# EAGLE board Z380X1B (EAGLE 3.51)

Size 160 x 100 mm. Coordinates in mm from the lower left corner, seen from the top.
Outline: 0,0 160,0 160,100 0,100 0,0
Copper layers used: 

## Footprints (pad centres in the part's own frame; a part is rotated, then mirrored left to right if it is on the bottom)
25M/90 = drill 1.016 pad 1.575 octagon:  16.764,-1.27;  13.97,-1.27;  11.176,-1.27;  8.382,-1.27;  5.588,-1.27;  2.794,-1.27;  0,-1.27;  -2.794,-1.27;  -5.588,-1.27;  -8.382,-1.27;  -11.176,-1.27;  -13.97,-1.27;  -16.764,-1.27;  15.367,1.27;  12.573,1.27;  9.779,1.27;  6.985,1.27;  4.191,1.27;  1.397,1.27;  -1.397,1.27;  -4.191,1.27;  -6.985,1.27;  -9.779,1.27;  -12.573,1.27;  -15.367,1.27 | hole 3.2: 23.622,0; -23.622,0
L-14 = drill 0.813 pad 1.397 octagon:  -7.62,-3.81;  -5.08,-3.81;  7.62,-3.81;  7.62,3.81;  -2.54,-3.81;  0,-3.81;  5.08,-3.81;  2.54,-3.81;  5.08,3.81;  2.54,3.81;  0,3.81;  -2.54,3.81;  -5.08,3.81;  -7.62,3.81
00-ADP = drill 0.813 pad 1.397 round:  -20.32,16.51;  -17.78,16.51;  -20.32,13.97;  -17.78,13.97;  -20.32,11.43;  -17.78,11.43;  -20.32,8.89;  -17.78,8.89;  -20.32,6.35;  -17.78,6.35;  -20.32,3.81;  -17.78,3.81;  -20.32,1.27;  -17.78,1.27;  -20.32,-1.27;  -17.78,-1.27;  -20.32,-3.81;  -17.78,-3.81;  -20.32,-6.35;  -17.78,-6.35;  -20.32,-8.89;  -17.78,-8.89;  -20.32,-11.43;  -17.78,-11.43;  -20.32,-13.97;  -17.78,-13.97;  -20.32,-16.51;  -17.78,-16.51;  -20.32,-19.05;  -17.78,-19.05;  -10.16,-26.67;  -10.16,-24.13;  -7.62,-26.67;  -7.62,-24.13;  -5.08,-26.67;  -5.08,-24.13;  -2.54,-26.67;  -2.54,-24.13;  0,-26.67;  0,-24.13;  2.54,-26.67;  2.54,-24.13;  5.08,-26.67;  5.08,-24.13;  7.62,-26.67;  7.62,-24.13;  10.16,-26.67;  10.16,-24.13;  12.7,-26.67;  12.7,-24.13;  20.32,-16.51;  17.78,-16.51;  20.32,-13.97;  17.78,-13.97;  20.32,-11.43;  17.78,-11.43;  20.32,-8.89;  17.78,-8.89;  20.32,-6.35;  17.78,-6.35;  20.32,-3.81;  17.78,-3.81;  20.32,-1.27;  17.78,-1.27;  20.32,1.27;  17.78,1.27;  20.32,3.81;  17.78,3.81;  20.32,6.35;  17.78,6.35;  20.32,8.89;  17.78,8.89;  20.32,11.43;  17.78,11.43;  20.32,13.97;  17.78,13.97;  20.32,16.51;  17.78,16.51;  20.32,19.05;  17.78,19.05;  10.16,26.67;  10.16,24.13;  7.62,26.67;  7.62,24.13;  5.08,26.67;  5.08,24.13;  2.54,26.67;  2.54,24.13;  0,26.67;  0,24.13;  -2.54,26.67;  -2.54,24.13;  -5.08,26.67;  -5.08,24.13;  -7.62,26.67;  -7.62,24.13;  -10.16,26.67;  -10.16,24.13;  -12.7,26.67;  -12.7,24.13
L-20 = drill 0.813 pad 1.397 octagon:  -11.43,-3.81;  -8.89,-3.81;  3.81,-3.81;  6.35,-3.81;  -6.35,-3.81;  -3.81,-3.81;  1.27,-3.81;  -1.27,-3.81;  8.89,-3.81;  11.43,-3.81;  11.43,3.81;  8.89,3.81;  6.35,3.81;  3.81,3.81;  1.27,3.81;  -1.27,3.81;  -3.81,3.81;  -6.35,3.81;  -8.89,3.81;  -11.43,3.81

## Placement (x,y rotation side)
C1  4.7æF  [10]  125.09,6.82 0 top
CON1  DB25M/90  [25M/90]  133.98,88.1 0 top
IC1  74HC393A  [L-14]  78.1,90.64 0 top
R1  10K  [10]  150.49,32.22 0 top
R2  1500E  [10]  132.71,16.98 0 top
R3  10K  [10]  149.22,43.65 0 top
S1  RESET  [AG-2]  145.41,11.9 0 top
U1  Z380-ADP  [00-ADP]  78.1,51.27 0 top
U2  MAX233  [L20]  32.38,34.76 270 top
U3  74LS74  [L-14]  43.81,86.83 270 top
U4  74LS04  [L-14]  139.06,57.62 0 top
U8  74F257A  [L16]  18.41,32.22 270 top
U9  74F257A  [L16]  46.35,27.14 270 top
U10  U380-1  [L-28]  83.18,14.44 0 top
U11  74F257A  [L16]  131.44,66.51 0 top
U12  MCM414256P  [L-20]  20.95,72.86 0 top
U13  MCM414256P  [L-20]  19.68,86.83 0 top
X1  19.6608  [L14-4]  55.24,88.1 270 top

## Library data of the parts
C1 R1-R3 = DISCRETE
CON1 = CONNECT
IC1 U3 U4 = 74XX
S1 U2 U8 U9 U11 X1 = OTHER
U1 = PROTO
U10 = ICT
U12 U13 = DRAM

## Nets
+5V: U2.
A0: U1. U8.
A1: U1. U8.
A2: U1. U8.
A3: U1. U8.
A4: U1. U8.
A5: U1. U8.
A6: U1. U8.
A7: U1. U8.
A8: U1. U9.
A9: U1. U9.
A10: U1. U9.
A11: U1. U9.
A12: U1. U9.
A13: U1. U9.
A14: U1. U9.
A15: U1. U9.
A16: U1. U11.
A17: U1. U11.
A18: U1. U11.
A19: U1. U11.
CLK4: IC1. U1.
CLK16: IC1.
CLRD: IC1. R3. U4.
D0: U1. U13.
D1: U1. U13.
D2: U1. U13.
D3: U1. U13.
D4: U1. U12.
D5: U1. U12.
D6: U1. U12.
D7: U1. U12.
DSR: CON1. U2.
DTR: CON1. U2.
GND: IC1. U2. U3. U4. U8. U9. U10. U11. U12. U13. X1.
GNDA: C1. CON1. R2. U3.
LMCS: U1. U12. U13.
MA0: U8. U12. U13.
MA1: U8. U12. U13.
MA2: U8. U12. U13.
MA3: U8. U12. U13.
MA4: U9. U12. U13.
MA5: U9. U12. U13.
MA6: U9. U12. U13.
MA7: U9. U12. U13.
MA8: U11. U12. U13.
MA9: U11. U12. U13.
MCS0: U1.
N$1: U3. U4.
N$2: U2.
N$3: R2. S1.
N$4: C1. R1. S1. U4.
N$5: U2.
N$6: U2.
RES*: U1. U3.
RESCLK: IC1. U3.
RXD: CON1. U2.
TREFA: U1. U8. U9. U11.
TREFC: U1. U12. U13.
TREFR: U1. U12. U13.
TXD: CON1. U2.
VCC: IC1. R1. R3. U3. U4. U8. U9. U10. U11. U12. U13. X1.
VDD: U1.
VOUT: IC1. X1.
VSS: U1.

## Tracks (layer width: path | path; a pad name or v marks a point on that pad's centre or on a via)
A0  (1 unrouted)
A1  (1 unrouted)
A2  (1 unrouted)
A3  (1 unrouted)
A4  (1 unrouted)
A5  (1 unrouted)
A6  (1 unrouted)
A7  (1 unrouted)
A8  (1 unrouted)
A9  (1 unrouted)
A10  (1 unrouted)
A11  (1 unrouted)
A12  (1 unrouted)
A13  (1 unrouted)
A14  (1 unrouted)
A15  (1 unrouted)
A16  (1 unrouted)
A17  (1 unrouted)
A18  (1 unrouted)
A19  (1 unrouted)
CLK4  (1 unrouted)
CLK16  (1 unrouted)
CLRD  (4 unrouted)
D0  (1 unrouted)
D1  (1 unrouted)
D2  (1 unrouted)
D3  (1 unrouted)
D4  (1 unrouted)
D5  (1 unrouted)
D6  (1 unrouted)
D7  (1 unrouted)
DSR  (1 unrouted)
DTR  (1 unrouted)
GND  (11 unrouted)
GNDA  (3 unrouted)
LMCS  (2 unrouted)
MA0  (2 unrouted)
MA1  (2 unrouted)
MA2  (2 unrouted)
MA3  (2 unrouted)
MA4  (2 unrouted)
MA5  (2 unrouted)
MA6  (2 unrouted)
MA7  (2 unrouted)
MA8  (2 unrouted)
MA9  (2 unrouted)
N$1  (1 unrouted)
N$2  (1 unrouted)
N$3  (1 unrouted)
N$4  (3 unrouted)
N$5  (1 unrouted)
N$6  (1 unrouted)
RES*  (1 unrouted)
RESCLK  (1 unrouted)
RXD  (1 unrouted)
TREFA  (3 unrouted)
TREFC  (2 unrouted)
TREFR  (2 unrouted)
TXD  (1 unrouted)
VCC  (12 unrouted)
VDD  (7 unrouted)
VOUT  (1 unrouted)
VSS  (7 unrouted)